# EAGLE board Central_board_01 (EAGLE 6.3)
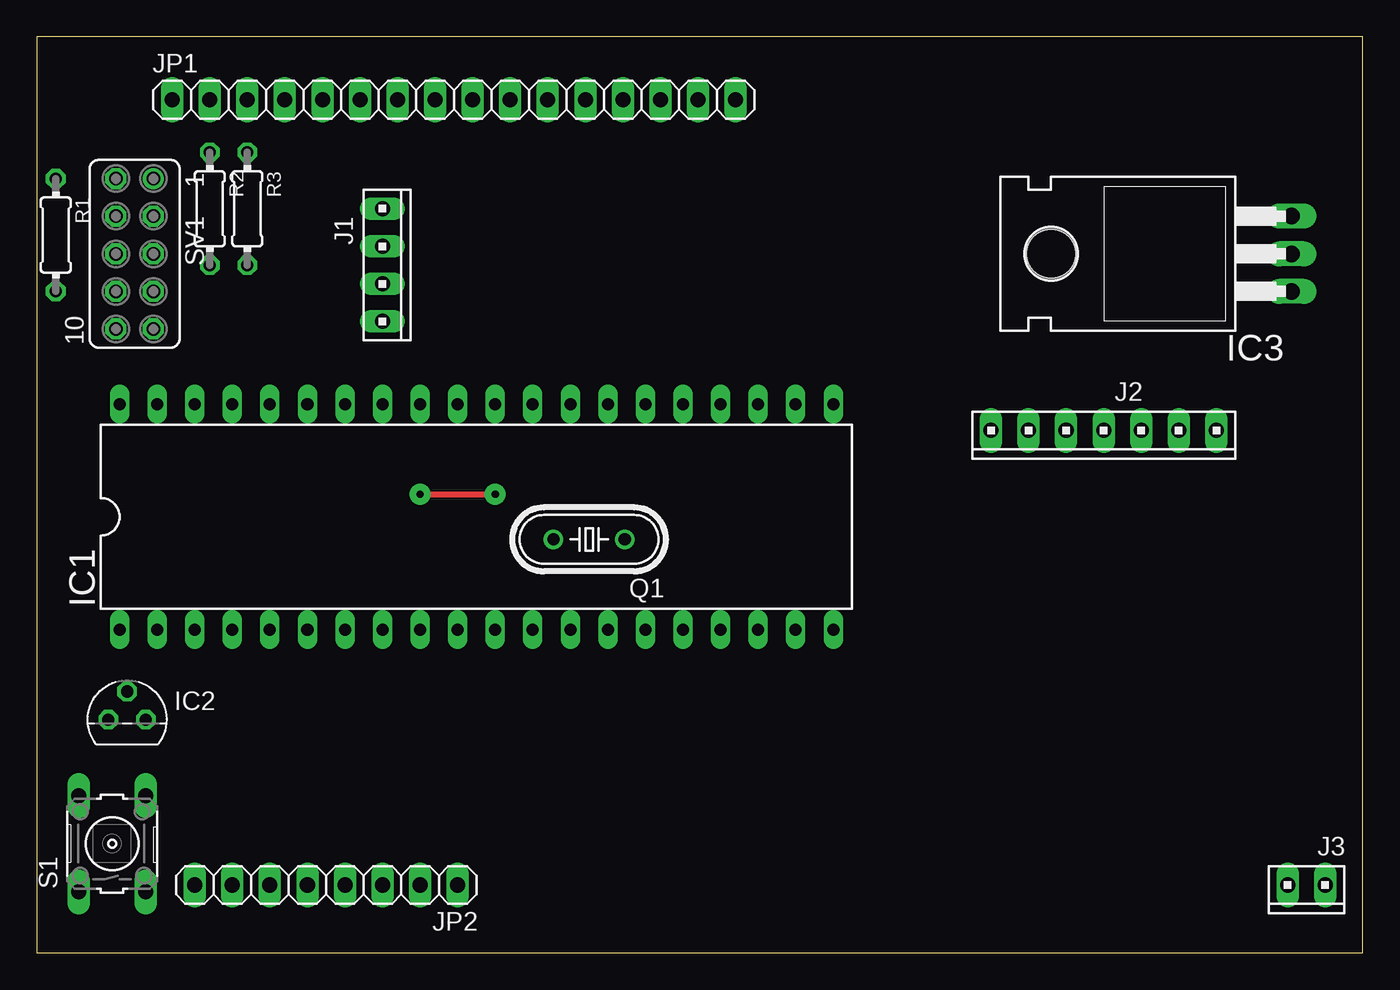
[diagram p0: board, top side]
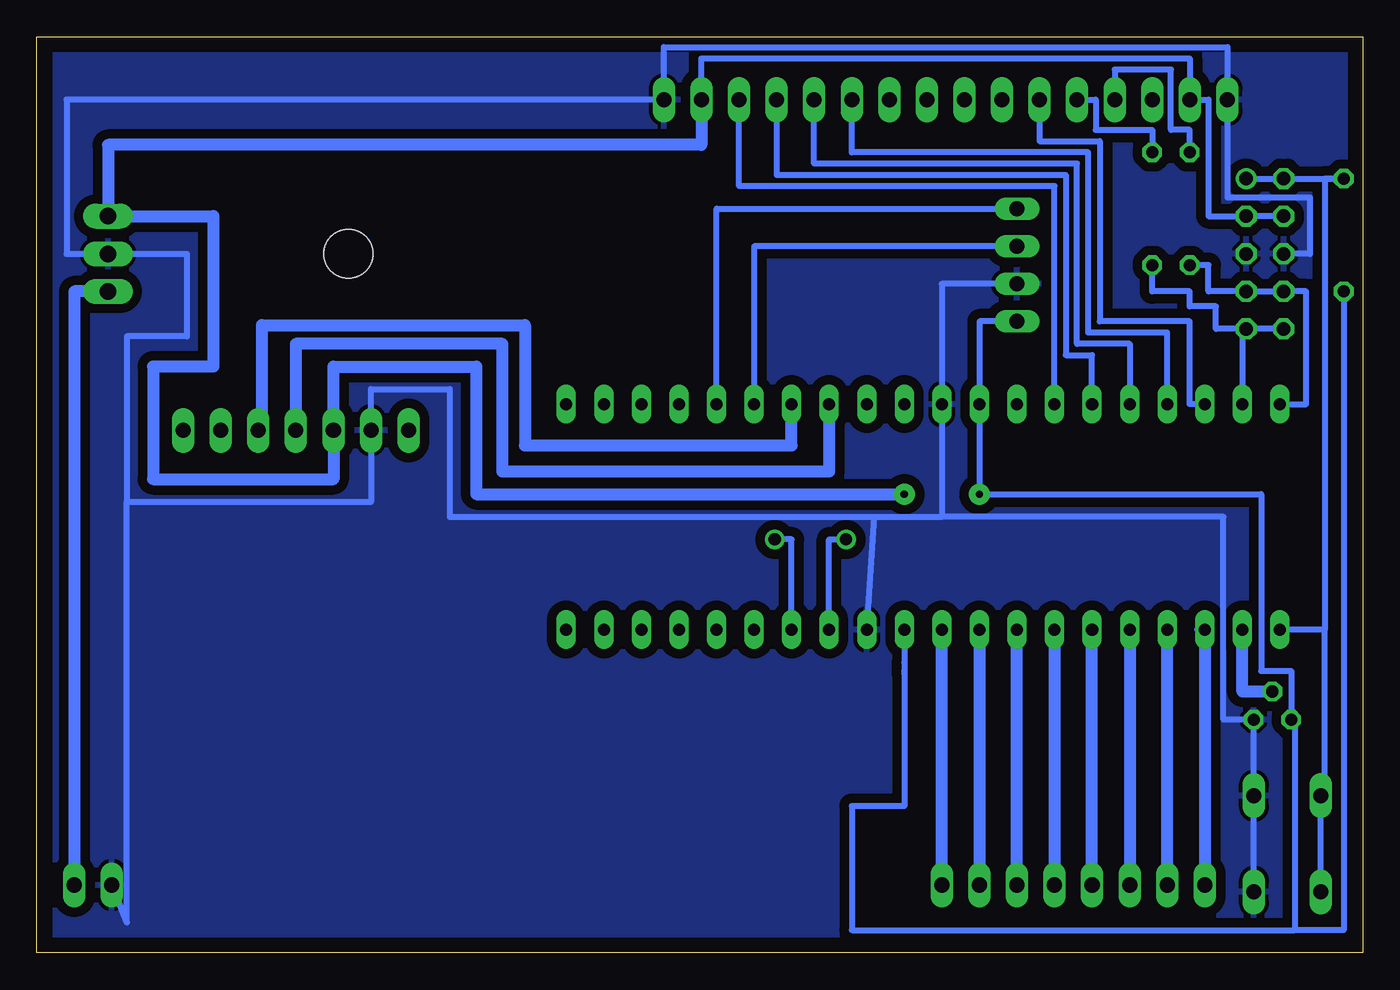
[diagram p1: board, bottom side, seen from below]

Size 89.64 x 61.9 mm. Coordinates in mm from the lower left corner, seen from the top.
Outline: 0,0 89.64,0 89.64,61.9 0,61.9 0,0
Copper layers (1*16): Top 0.035mm / dielectric 1.5mm / Bottom 0.035mm
Design rules "default *": minimum track width 10mil, minimum drill 24mil, track to track 25mil, track to pad 25mil, pad to pad 8mil, via to via 8mil, smd to smd 8mil, copper to edge 40mil, drill to drill 8mil, minimum pad ring 10mil, minimum via ring 8mil, stop-mask expansion 4mil, vias tented up to drill 0mil, thermal gap 10mil

## Footprints (pad centres in the part's own frame; a part is rotated, then mirrored left to right if it is on the bottom)
DIL40 = drill 0.813 long: 1 -24.13,-7.62; 2 -21.59,-7.62; 3 -19.05,-7.62; 4 -16.51,-7.62; 5 -13.97,-7.62; 6 -11.43,-7.62; 7 -8.89,-7.62; 8 -6.35,-7.62; 9 -3.81,-7.62; 10 -1.27,-7.62; 11 1.27,-7.62; 12 3.81,-7.62; 13 6.35,-7.62; 14 8.89,-7.62; 15 11.43,-7.62; 16 13.97,-7.62; 17 16.51,-7.62; 18 19.05,-7.62; 19 21.59,-7.62; 20 24.13,-7.62; 21 24.13,7.62; 22 21.59,7.62; 23 19.05,7.62; 24 16.51,7.62; 25 13.97,7.62; 26 11.43,7.62; 27 8.89,7.62; 28 6.35,7.62; 29 3.81,7.62; 30 1.27,7.62; 31 -1.27,7.62; 32 -3.81,7.62; 33 -6.35,7.62; 34 -8.89,7.62; 35 -11.43,7.62; 36 -13.97,7.62; 37 -16.51,7.62; 38 -19.05,7.62; 39 -21.59,7.62; 40 -24.13,7.62
TO92 = drill 0.813 octagon: 1 1.27,0; 2 0,1.905; 3 -1.27,0
TO220H = drill 1.118 long: 1 -2.54,-11.43; 2 0,-11.43; 3 2.54,-11.43 | hole 3.302: 0,4.826
10X04MTA = drill 1.016 long: 1 3.81,0; 2 1.27,0; 3 -1.27,0; 4 -3.81,0
10X07MTA = drill 1.016 long: 1 7.62,0; 2 5.08,0; 3 2.54,0; 4 0,0; 5 -2.54,0; 6 -5.08,0; 7 -7.62,0
10X02MTA = drill 1.016 long: 1 1.27,0; 2 -1.27,0
1X16 = drill 1.016 long: 1 -19.05,0; 2 -16.51,0; 3 -13.97,0; 4 -11.43,0; 5 -8.89,0; 6 -6.35,0; 7 -3.81,0; 8 -1.27,0; 9 1.27,0; 10 3.81,0; 11 6.35,0; 12 8.89,0; 13 11.43,0; 14 13.97,0; 15 16.51,0; 16 19.05,0
1X08 = drill 1.016 long: 1 -8.89,0; 2 -6.35,0; 3 -3.81,0; 4 -1.27,0; 5 1.27,0; 6 3.81,0; 7 6.35,0; 8 8.89,0
HC49/S = drill 0.813: 1 -2.413,0; 2 2.413,0
0204/7 = drill 0.813 octagon: 1 -3.81,0; 2 3.81,0
B3F-10XX = drill 1.016 long: 1 -3.251,2.261; 2 3.251,2.261; 3 -3.251,-2.261; 4 3.251,-2.261
FE05-2 = drill 0.914: 1 -5.08,1.27 | drill 0.914 octagon: 2 -5.08,-1.27; 3 -2.54,1.27; 4 -2.54,-1.27; 5 0,1.27; 6 0,-1.27; 7 2.54,1.27; 8 2.54,-1.27; 9 5.08,1.27; 10 5.08,-1.27

## Placement (x,y rotation side)
IC1  PIC16F877P  [DIL40]  29.72,29.46 0 top
IC2  LM35  [TO92]  6.1,15.75 0 top
IC3  7805T  [TO220H]  73.41,47.24 90 top
J1  [10X04MTA]  23.37,46.48 270 top
J2  [10X07MTA]  72.14,35.31 180 top
J3  [10X02MTA]  85.85,4.57 180 top
JP1  [1X16]  28.19,57.66 0 top
JP2  [1X08]  19.56,4.57 180 top
Q1  [HC49/S]  37.34,27.94 180 top
R1  [0204/7]  1.27,48.51 270 top
R2  [0204/7]  11.68,50.29 270 top
R3  [0204/7]  14.22,50.29 270 top
S1  [B3F-10XX]  5.08,7.37 90 top
SV1  [FE05-2]  6.6,47.24 270 top

## Library data of the parts
IC1 = microchip; MF: MICROCHIP; MPN: PIC16F877-04/P; OC_FARNELL: 9761349; OC_NEWARK: 61K3463
IC2 = LM35
IC3 = linear
J1-J3 = con-amp
JP1 JP2 = pinhead
Q1 = crystal; OC_FARNELL: 1667008; OC_NEWARK: unknown
R1-R3 = rcl
S1 = switch-omron; MPN: B3F-1000; OC_FARNELL: 176432; OC_NEWARK: 36M3542
SV1 = con-lsta; OC_FARNELL: unknown; OC_NEWARK: unknown

## Nets
AGND: IC1.12 IC1.31 IC2.1 IC3.2 J1.2 J2.2 J3.1 JP1.1 JP1.16 S1.3 S1.4 SV1.5 SV1.6
N$1: JP1.4 R2.1
N$2: IC1.14 Q1.1
N$3: IC1.13 Q1.2
N$4: IC1.2 IC2.2
N$5: JP1.5 R3.1
N$6: IC1.10 JP2.1
N$7: IC1.38 JP1.6
N$8: IC1.37 JP1.11
N$9: IC1.36 JP1.12
N$10: IC1.35 JP1.13
N$11: IC1.34 JP1.14
N$12: IC1.9 JP2.2
N$13: IC1.8 JP2.3
N$14: IC1.25 J1.4
N$15: IC1.26 J1.3
N$16: IC1.27 J2.5
N$17: IC1.28 J2.4
N$18: IC3.1 J3.2
N$19: IC1.7 JP2.4
N$20: IC1.6 JP2.5
N$21: IC1.5 JP2.6
N$22: IC1.4 JP2.7
N$23: IC1.3 JP2.8
PGC: IC1.39 R3.2 SV1.9 SV1.10
PGD: IC1.40 R2.2 SV1.7 SV1.8
RES: IC1.1 R1.1 S1.1 S1.2 SV1.1 SV1.2
VDD: IC1.11 IC1.32 IC2.3 IC3.3 J1.1 J2.3 JP1.2 JP1.15 R1.2 SV1.3 SV1.4

## Tracks (layer width: path | path; a pad name or v marks a point on that pad's centre or on a via)
AGND
  Bottom 0.406: SV1.6 3.56,47.24 3.56,51.05 9.14,51.05 JP1.1 9.14,61.21 47.24,61.21 JP1.16 87.63,57.66 87.63,47.24 IC3.2 79.5,47.24 79.5,41.66 83.57,41.66 83.57,30.48 | S1.3 S1.4 7.34,15.75 IC2.1 9.4,15.75 9.4,29.46 28.45,29.46 | 83.57,30.48 67.06,30.48 J2.2 67.06,38.1 61.72,38.1 61.72,29.46 33.02,29.46 | 28.45,29.46 IC1.31 28.45,45.21 J1.2 | 33.02,29.46 28.45,29.46 | IC1.12 33.02,29.46 | J3.1 83.57,2.03 83.57,30.48
  pour Bottom: 0,61.98 88.39,61.98 88.39,0 0,0
N$1
  Bottom 0.406: R2.1 11.68,55.63 12.95,55.63 12.95,59.69 16.76,59.69 JP1.4
N$2
  Bottom 0.406: IC1.14 38.61,27.94 Q1.1
N$3
  Bottom 0.406: IC1.13 36.07,27.94 Q1.2
N$4
  Bottom 0.813: IC2.2 8.13,17.65 IC1.2
N$5
  Bottom 0.406: JP1.5 18.03,57.66 18.03,55.63 14.22,55.63 R3.1
N$6
  Bottom 0.813: JP2.1 IC1.10
N$7
  Bottom 0.406: JP1.6 21.84,54.86 17.78,54.86 17.78,42.67 11.68,42.67 11.68,37.08 IC1.38
N$8
  Bottom 0.406: IC1.37 13.21,41.91 18.54,41.91 18.54,54.1 34.54,54.1 JP1.11
N$9
  Bottom 0.406: IC1.36 15.75,41.15 19.3,41.15 19.3,53.34 37.08,53.34 JP1.12
N$10
  Bottom 0.406: IC1.35 18.29,40.39 20.07,40.39 20.07,52.58 39.62,52.58 JP1.13
N$11
  Bottom 0.406: IC1.34 20.83,51.82 42.16,51.82 JP1.14
N$12
  Bottom 0.813: IC1.9 JP2.2
N$13
  Bottom 0.813: JP2.3 IC1.8
N$14
  Bottom 0.406: IC1.25 43.69,50.29 J1.4
N$15
  Bottom 0.406: J1.3 41.15,47.75 IC1.26
N$16
  Bottom 0.406: J2.5 74.42,35.31
  Bottom 0.813: 74.42,35.31 74.42,42.42 56.64,42.42 56.64,34.29 38.61,34.29 IC1.27
N$17
  Bottom 0.813: IC1.28 36.07,32.51 58.17,32.51 58.17,41.15 72.14,41.15 J2.4
N$18
  Bottom 0.813: IC3.1 87.12,44.7 J3.2
N$19
  Bottom 0.813: IC1.7 JP2.4
N$20
  Bottom 0.813: JP2.5 IC1.6
N$21
  Bottom 0.813: IC1.5 JP2.6
N$22
  Bottom 0.406: 12.95,21.84 IC1.4
  Bottom 0.813: JP2.7 IC1.4
N$23
  Bottom 0.406: 11.18,21.84 IC1.3
  Bottom 0.813: IC1.3 JP2.8
PGC
  Bottom 0.406: SV1.10 SV1.9 | R3.2 14.22,44.7 11.68,44.7 11.68,43.69 9.91,43.69 9.91,42.16 SV1.9 | SV1.9 8.13,42.16 IC1.39
PGD
  Bottom 0.406: R2.2 10.41,46.48 10.41,44.7 SV1.7 SV1.8 3.81,44.7 3.81,37.08 IC1.40
RES
  Bottom 0.406: SV1.1 SV1.2 R1.1 2.54,52.32 2.54,21.84 | 2.54,21.84 IC1.1 | S1.1 S1.2 2.54,10.36 2.54,21.84
VDD  (via drill 0.5 pad 1.42)
  Top 0.406: v25.91,30.99 v30.99,30.99
  Bottom 0.406: SV1.4 SV1.3 10.41,49.78 10.41,57.66 JP1.2 11.68,60.45 44.7,60.45 JP1.15 | R1.2 1.27,1.52 4.57,1.52 | 30.99,19.05 31,18.85 30.99,19.62 | 30.99,19.62 30.99,9.91 34.54,9.91 34.54,1.52 4.57,1.52 | 4.57,1.52 4.57,15.49 IC2.3 4.83,19.05 6.86,19.05 6.86,30.99 v25.91,30.99 IC1.32 25.91,42.67 J1.1 | IC1.11 30.99,19.62
  Bottom 0.813: JP1.15 44.7,54.61 84.84,54.61 IC3.3 77.72,49.78 77.72,39.62 81.79,39.62 81.79,32 69.6,32 J2.3 69.6,39.62 59.94,39.62 59.94,30.99 v30.99,30.99